# Altium PCB STM8_DevBoard.PcbDoc
Units mm, origin at the board's own origin, x right, y up, seen from the top; angles counter-clockwise.
Board outline 31.25 x 37.5 mm, 2 copper layers (Top Layer, Bottom Layer); 19 components, 24 nets, 85 pads, 5 vias.
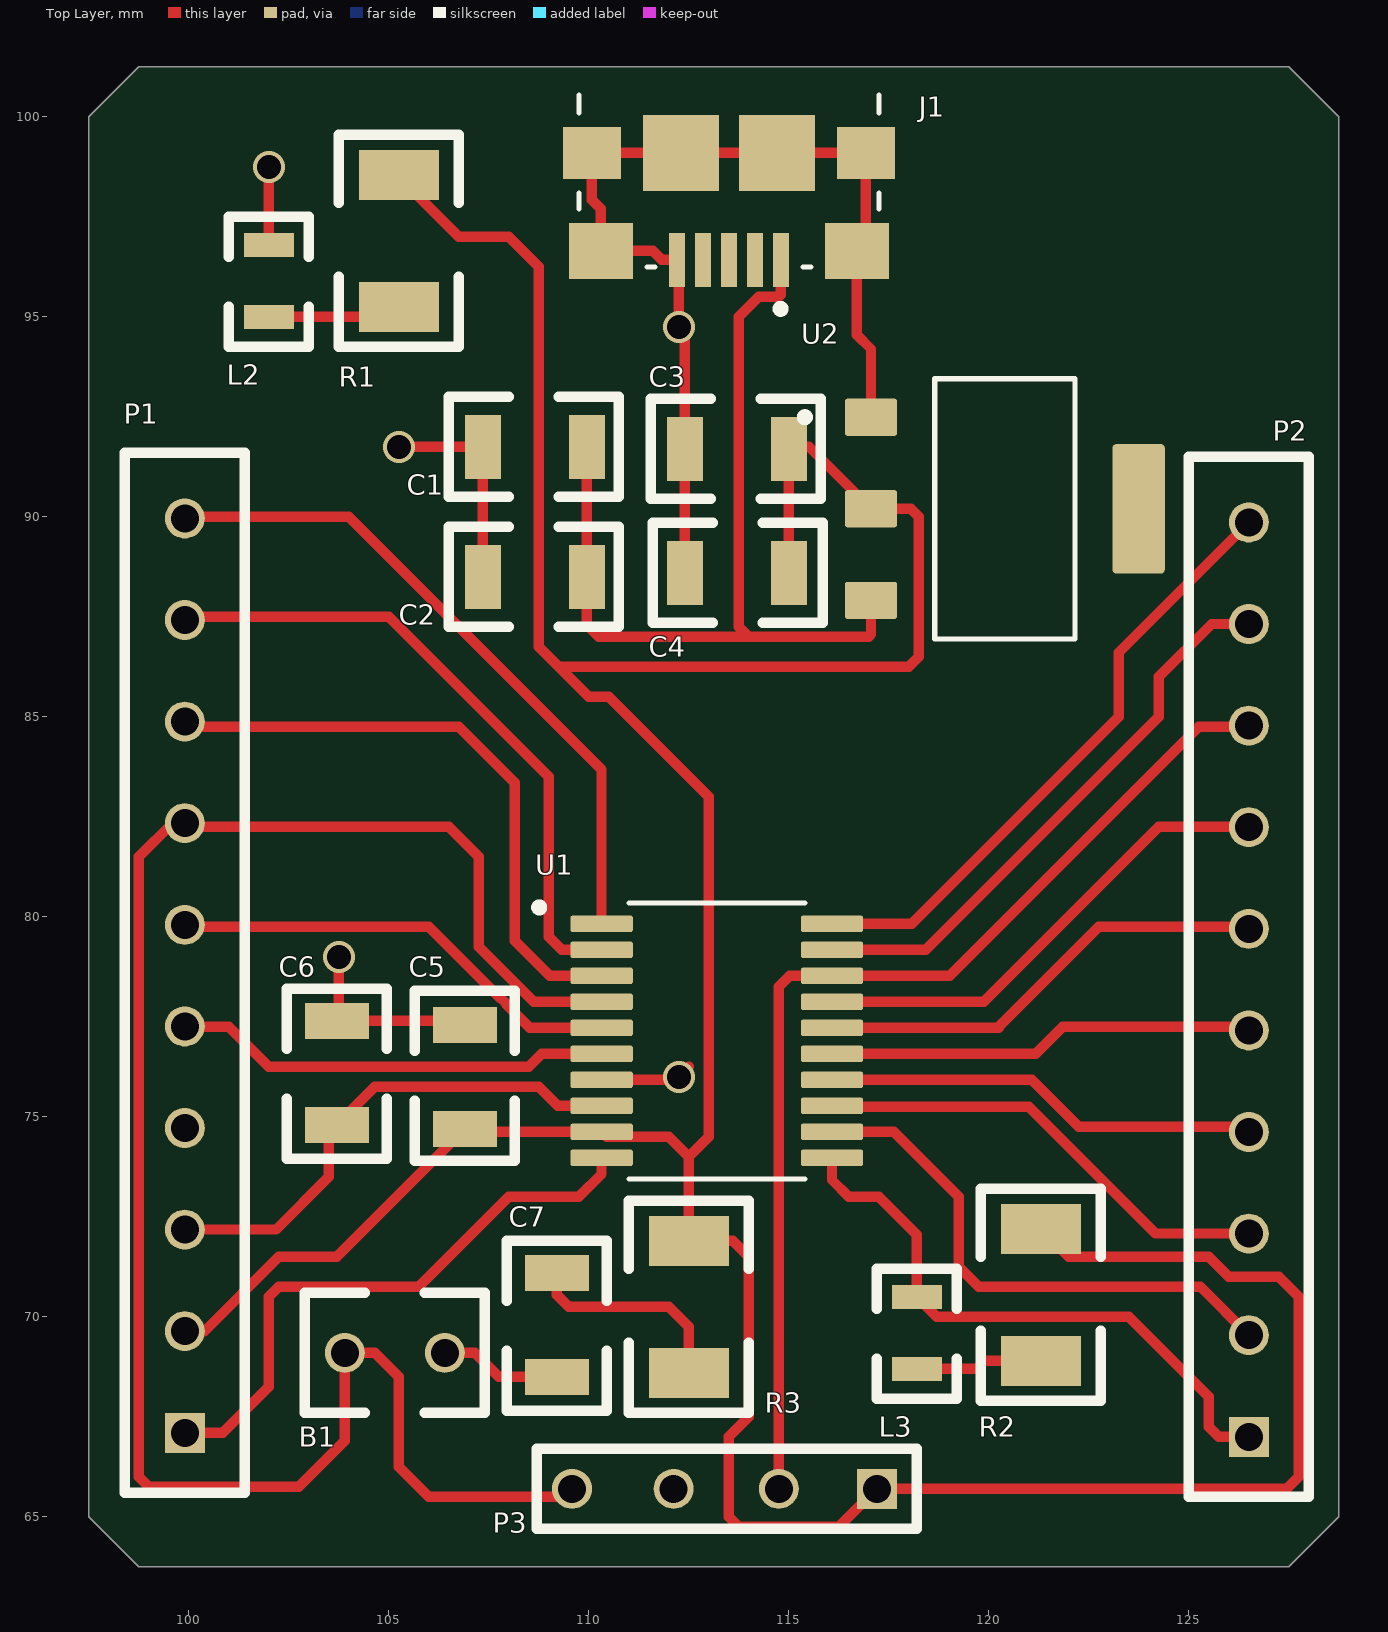
[diagram p0: Top Layer view]
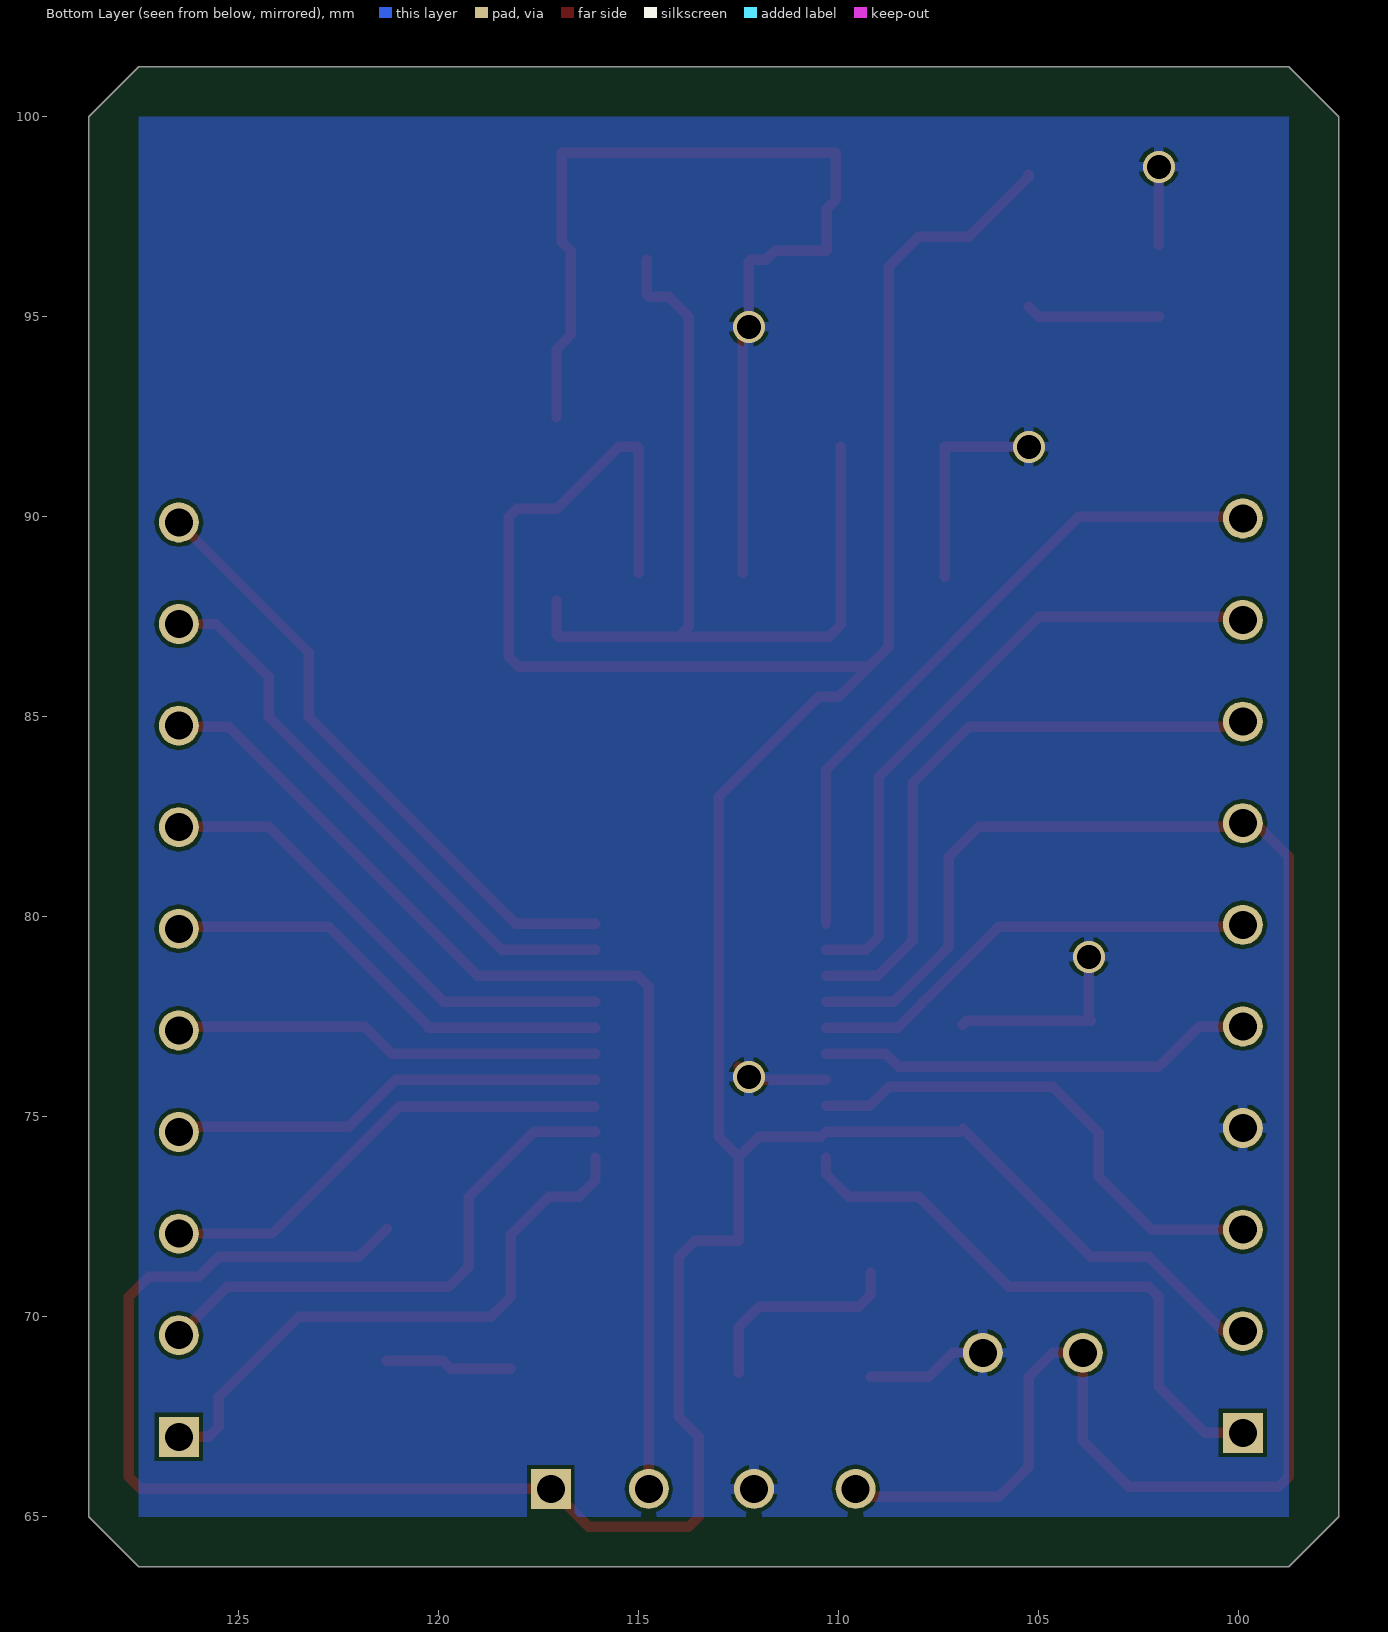
[diagram p1: Bottom Layer view, seen from below]

## Layer stack, top to bottom
Top Layer: signal copper 0.0356
Dielectric: dielectric 0.32, FR-4, Dk 4.8
Bottom Layer: signal copper 0.0356

## Board outline
97.5,65 97.5,100 98.75,101.25 127.5,101.25 128.75,100 128.75,65 127.5,63.75 98.75,63.75

## Design rules (kind name [scope] priority, off if disabled: settings)
Clearance [All] p1: gap=0.1
HoleToHoleClearance [All] p1: gap=0.1 allowstackedmicrovias=TRUE
MinimumSolderMaskSliver [All] p1: minsoldermaskwidth=0.1
PolygonConnect [All] p1: connectstyle=Relief reliefconductorwidth=0.254 reliefentries=4 polygonreliefangle="90 Angle"
RoutingVias [All] p1: holewidth=0.7 width=0.7 viastyle="Through Hole" minholewidth=0.3 minwidth=0.3 maxholewidth=2 maxwidth=2
SilkToSilkClearance [All] p1: silktosilkclearance=0.1
SilkscreenOverComponentPads [All] p1: minsilkscreentomaskgap=0.1
SolderMaskExpansion [All] p1: expansion=0.102
Width [All] p1: maxlimit=2 minlimit=0.2 preferedwidth=0.4
24 further rules are at their usual default settings.

## Classes and differential pairs
component class STM8_DevBoard: B1 C1 C2 C3 C4 C5 C6 C7 L2 L3 P1 P2 P3 R1 R2 R3 U1

## Components (designator, comment, footprint, x,y, rotation, side; value= is the part's Value field where it differs from the comment)
B1 "Push Button" NRST 103.9,69.1 r0 top
C1 "10uF" 1206_Capacitor 107.25,91.75 r0 top
C2 "100nF" 1206_Capacitor 107.25,88.5 r0 top
C3 "100nF" 1206_Capacitor 112.3,91.7 r0 top
C4 "10uF" 1206_Capacitor 115.1,88.6 r180 top
C5 "100nF" 1206_Capacitor 106.9,77.4 r270 top
C6 "100nF" 1206_Capacitor 103.7,74.7 r90 top
C7 "100nF" 1206_Capacitor 109.2,68.4 r90 top
J1 "1981568-1" TE_1981568-1 113.5,99.1 r180 top
L2 "RED LED" 0805_LED 102,95 r90 top
L3 "RED LED" 0805_LED 118.2,68.7 r90 top
P1 "Header 10" "Header 10" 99.9,67.1 r90 top
P2 "Header 10" "Header 10" 126.5,67 r90 top
P3 "Header 4" "Header 4" 117.2,65.7 r180 top
R1 "1k" "1206 Resistor" 105.25,95.25 r90 top
R2 "1k" "1206 Resistor" 121.3,68.9 r90 top
R3 "10k" "1206 Resistor" 112.5,68.6 r90 top
U1 "STM8S003F3P6TR" SOP65P640X120-20N 113.2,76.9 r0 top
U2 "AMS1117-3.3" SOT229P700X180-4N 120.4,90.2 r0 top

## Footprints (in the part's own frame and the unit in brackets; to place one, negate y for a bottom-side part, rotate by r counter-clockwise, add the part's x,y. Pads: shape width x height; smd on the part's side, far side on the other; paste and mask are expansions set on the pad)
0805_LED [mm]
  rect 0.6x1.25 smd: L_1(0,0) L_2(1.8,0)
  silkscreen extent -0.75,-1 2.5,1
"1206 Resistor" [mm]
  rect 1.25x2 smd: 1(0,0) 2(3.3,0)
  silkscreen extent -1,-1.5 4.3,1.5
1206_Capacitor [mm]
  rect 0.9x1.6 smd: 1(0.1,0) 2(2.7,0)
  silkscreen extent -0.75,-1.25 3.5,1.25
"Header 4" [mm]
  rect 1x1 hole 0.7: 1(0,0)
  round 1 hole 0.7: 2(2.45,0) 3(5.08,0) 4(7.62,0)
  silkscreen extent -1,-1 8.5,1
"Header 10" [mm]
  rect 1x1 hole 0.7: 1(0,0)
  round 1 hole 0.7: 2(2.54,0) 3(5.08,0) 4(7.62,0) 5(10.16,0) 6(12.7,0) 7(15.24,0) 8(17.78,0) 9(20.32,0) 10(22.86,0)
  silkscreen extent -1.5,-1.5 24.5,1.5
NRST [mm]
  round 1 hole 0.7: 1(0,0) 2(2.5,0)
  silkscreen extent -1,-1.5 3.5,1.5
SOP65P640X120-20N [mm]
  rrect25% 1.56x0.41 smd: 1(-2.88,2.925) 2(-2.88,2.275) 3(-2.88,1.625) 4(-2.88,0.975) 5(-2.88,0.325) 6(-2.88,-0.325) 7(-2.88,-0.975) 8(-2.88,-1.625) 9(-2.88,-2.275) 10(-2.88,-2.925) 11(2.88,-2.925) 12(2.88,-2.275) 13(2.88,-1.625) 14(2.88,-0.975) 15(2.88,-0.325) 16(2.88,0.325) 17(2.88,0.975) 18(2.88,1.625) 19(2.88,2.275) 20(2.88,2.925)
  silkscreen extent -4.54,-3.45 2.2,3.45
SOT229P700X180-4N [mm]
  rrect15% 1.31x0.93 smd: 1(-3.345,2.29) 2(-3.345,0) 3(-3.345,-2.29)
  rrect15% 1.31x3.24 smd: 4(3.345,0)
  silkscreen extent -5.1,-3.25 1.75,3.25, body extent -3.5,-3.25 3.5,3.25, height 1.8
TE_1981568-1 [mm]
  rect 0.4x1.35 smd: 1(-1.3,2.675) 2(-0.65,2.675) 3(0,2.675) 4(0.65,2.675) 5(1.3,2.675)
  rect 1.6x1.4 smd: SH1(-3.2,2.45) SH2(3.2,2.45)
  rect 1.45x1.3 smd: SH3(3.425,0) SH6(-3.425,0)
  rect 1.9x1.9 smd: SH4(1.2,0) SH5(-1.2,0)
  silkscreen extent -3.75,-1.45 3.75,4, body extent -4,0 4,5.6, height 1.54

## Part data
C1 C2 C3 C4 C5 C6 C7: library part 1206_Capacitor
L2 L3: library part 0805_LED
R1 R2 R3: library part "1206 Resistor"
U1: "STM8 STM8S Microcontroller IC 8-Bit 16MHz 8KB (8K x 8) FLASH 20-TSSOP"
U2: "Sot223/Pkg 1-Amp 3.3-Volt Low Drop Out Voltage Regulatator"

## Via types
v1: diameter 0.8, hole 0.6, Top Layer to Bottom Layer, 5 vias

## Nets (pads, with @x,y where several pads share a name; then routed paths per layer and width w, separated by ;. In a path a pad name is that pad's centre, name@x,y a point inside that pad or via, vN(x,y) a via of type N, cw(c..) or ccw(c..) an arc to the next point about the centre after c; other vN are vias at no path point)
3V3: C3.2 C4.1 C5.2 P1.2 P3.1 R1.2 R2.2 R3.2 U1.9 U2.2 | length 100.7
  Top Layer w0.254: P1.2 100.39,69.64 102.25,71.5 103.7,71.5 C5.2 106.975,74.625 U1.9 110.445,74.5 112,74.5 112.5,74 ; R1.2 105.25,98.5 106.75,97 108,97 108.75,96.25 108.75,86.75 109.25,86.25 ; C4.1 C3.2 115.05,91.75 115.505,91.75 U2.2 118.05,90.2 118.25,90 118.25,86.5 118,86.25 109.25,86.25 ; R2.2 122,71.5 125.5,71.5 126,71 127.25,71 127.75,70.5 127.75,66 127.45,65.7 P3.1 116.25,64.75 113.75,64.75 113.5,65 113.5,67 114,67.5 114,71.5 113.6,71.9 R3.2 112.5,74 ; 109.25,86.25 110,85.5 110.5,85.5 113,83 113,74.5 112.5,74
GND: B1.2 C1.1 C2.1 C3.1 C4.2 C5.1 C6.2 C7.1 J1.5 J1.SH1 J1.SH2 J1.SH3 J1.SH4 J1.SH5 J1.SH6 L2.L_2 P1.4 P3.3 U1.7 U2.1 | length 43.7
  Top Layer w0.254: L2.L_2 v1(102,98.75) ; v1(103.75,79) 103.75,77.45 C6.2 106.8,77.4 C5.1 ; v1(105.25,91.75) C1.1 C2.1 ; B1.2 107.15,69.1 107.75,68.5 C7.1 ; U1.7 112.175,75.925 v1(112.25,76) v1@112.5,76.25 ; C4.2 C3.1 112.4,94.6 v1(112.25,94.75) 112.25,96.375 J1.5 111.825,96.425 111.6,96.65 J1.SH2 110.3,97.7 110.075,97.925 J1.SH3 J1.SH4 J1.SH5 J1.SH6 116.925,96.875 J1.SH1 116.7,94.55 117.055,94.195 U2.1
NetC7_2: C7.2 R3.1 | length 5.3
  Top Layer w0.254: C7.2 109.2,70.55 109.5,70.25 112,70.25 112.5,69.75 R3.1
NetL2_L_1: L2.L_1 R1.1 | length 3.4
  Top Layer w0.254: L2.L_1 105,95 R1.1
NetL3_L_1: L3.L_1 R2.1 | length 3.2
  Top Layer w0.254: L3.L_1 119.7,68.7 119.9,68.9 R2.1
NRST: B1.1 P1.7 P3.4 U1.4 | length 47.1
  Top Layer w0.254: P3.4 109.38,65.5 106,65.5 105.25,66.25 105.25,68.5 104.65,69.1 B1.1 103.9,66.9 102.75,65.75 99,65.75 98.75,66 98.75,81.5 99.59,82.34 P1.7 99.99,82.25 106.5,82.25 107.25,81.5 107.25,79.25 108.625,77.875 U1.4
PA1: P1.6 U1.5 | length 11.5
  Top Layer w0.254: P1.6 99.95,79.75 106,79.75 107.773,77.977 107.794,77.977 107.927,77.844 107.927,77.823 108.525,77.225 U1.5
PA2: P1.5 U1.6 | length 11
  Top Layer w0.254: P1.5 99.91,77.25 101,77.25 102,76.25 108.5,76.25 108.825,76.575 U1.6
PA3: P1.1 U1.10 | length 14.8
  Top Layer w0.254: P1.1 100.85,67.1 102,68.25 102,70.5 102.25,70.75 105.75,70.75 108,73 109.75,73 110.32,73.57 U1.10
PB4: P2.2 U1.12 | length 13.6
  Top Layer w0.254: U1.12 117.625,74.625 119.25,73 119.25,71.25 119.75,70.75 125.29,70.75 P2.2
PB5: L3.L_2 P2.1 U1.11 | length 15
  Top Layer w0.254: U1.11 116.08,73.42 116.5,73 117.25,73 118,72.25 118.2,72.05 L3.L_2 118.7,70 123.5,70 125.5,68 125.5,67.25 125.75,67 P2.1
PC3: P2.3 U1.13 | length 11.7
  Top Layer w0.254: U1.13@116.105,75.25 121,75.25 124.17,72.08 P2.3
PC4: P2.4 U1.14 | length 11
  Top Layer w0.254: U1.14 121.075,75.925 122.25,74.75 126.37,74.75 P2.4
PC5: P2.5 U1.15 | length 10.7
  Top Layer w0.254: U1.15 121.175,76.575 121.85,77.25 126.41,77.25 P2.5
PC6: P2.6 U1.16 | length 11.5
  Top Layer w0.254: U1.16 120.25,77.225 120.25,77.25 122.75,79.75 126.45,79.75 P2.6
PC7: P2.7 U1.17 | length 12.2
  Top Layer w0.254: U1.17 119.875,77.875 124.25,82.25 126.49,82.25 P2.7
PD1: P2.8 P3.2 U1.18 | length 27
  Top Layer w0.254: P3.2 114.75,78.25 115.025,78.525 U1.18 119.025,78.525 125.25,84.75 126.47,84.75 P2.8
PD2: P2.9 U1.19 | length 14.4
  Top Layer w0.254: U1.19 118.425,79.175 124.25,85 124.25,86 125.57,87.32 P2.9
PD3: P2.10 U1.20 | length 15.5
  Top Layer w0.254: U1.20 118.075,79.825 123.25,85 123.25,86.61 P2.10
PD4: P1.10 U1.1 | length 16.9
  Top Layer w0.254: P1.10 99.94,90 104,90 110.32,83.68 U1.1
PD5: P1.9 U1.2 | length 16.2
  Top Layer w0.254: P1.9 99.98,87.5 105,87.5 109,83.5 109,79.5 109.325,79.175 U1.2
PD6: P1.8 U1.3 | length 15.4
  Top Layer w0.254: P1.8 100.03,84.75 106.75,84.75 108.15,83.35 108.15,79.4 109.025,78.525 U1.3
VCAP: C6.1 P1.3 U1.8 | length 12.7
  Top Layer w0.254: P1.3 102.18,72.18 103.5,73.5 103.5,74.6 C6.1 104.65,75.75 108.75,75.75 109.225,75.275 U1.8
VCC: C1.2 C2.2 J1.1 U2.3 | length 22.8
  Top Layer w0.254: C1.2 C2.2 109.95,87.3 110.25,87 114,87 ; J1.1 114.8,95.55 114.75,95.5 114.25,95.5 113.75,95 113.75,87.25 114,87 ; U2.3 117.055,87.055 117,87 114,87
pads on no net: J1.2 J1.3 J1.4 U2.4

## Polygon pours and split planes (outlines as drawn)
GND on Bottom Layer "Bottom Layer-No Net" (solid, pour order 2): 99,100 127.5,100 127.5,65 98.75,65 98.75,100

## Silkscreen, mask and mechanical layers (free items; w line width, h text height)
Mechanical 1:
  the board outline again, w0.254

## Text inside footprints (layer, text, board x,y; h text height)
J1: Mechanical 13 "PCB EDGE" at 108.774,100.306 h0.81 r180